# Altium PCB PCB2.PcbDoc
Units mm, origin at the board's own origin, x right, y up, seen from the top; angles counter-clockwise.
Board outline 71.63 x 26.92 mm, 2 copper layers (Top Layer, Bottom Layer); 9 components, 8 nets, 27 pads, 0 vias.
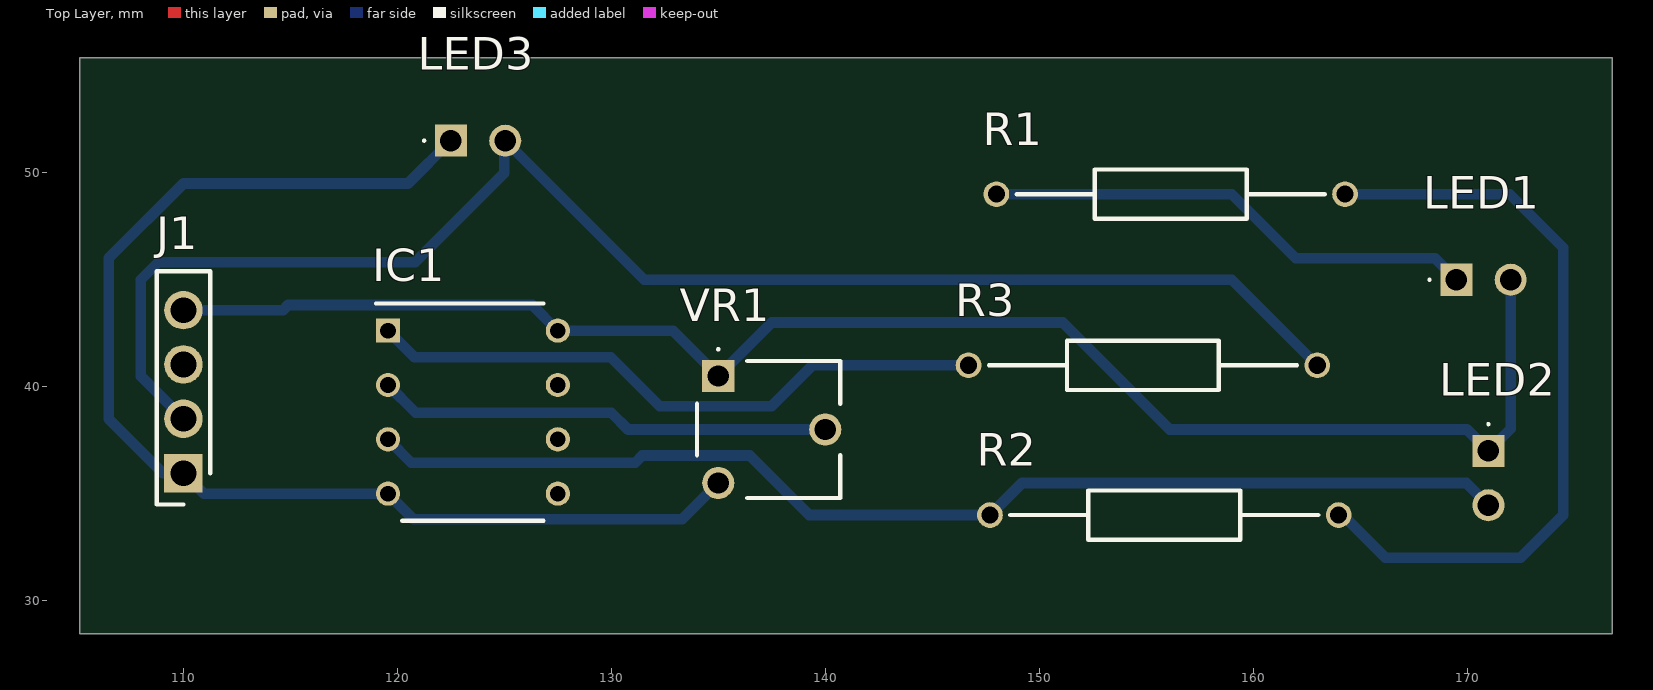
[diagram p0: Top Layer view]
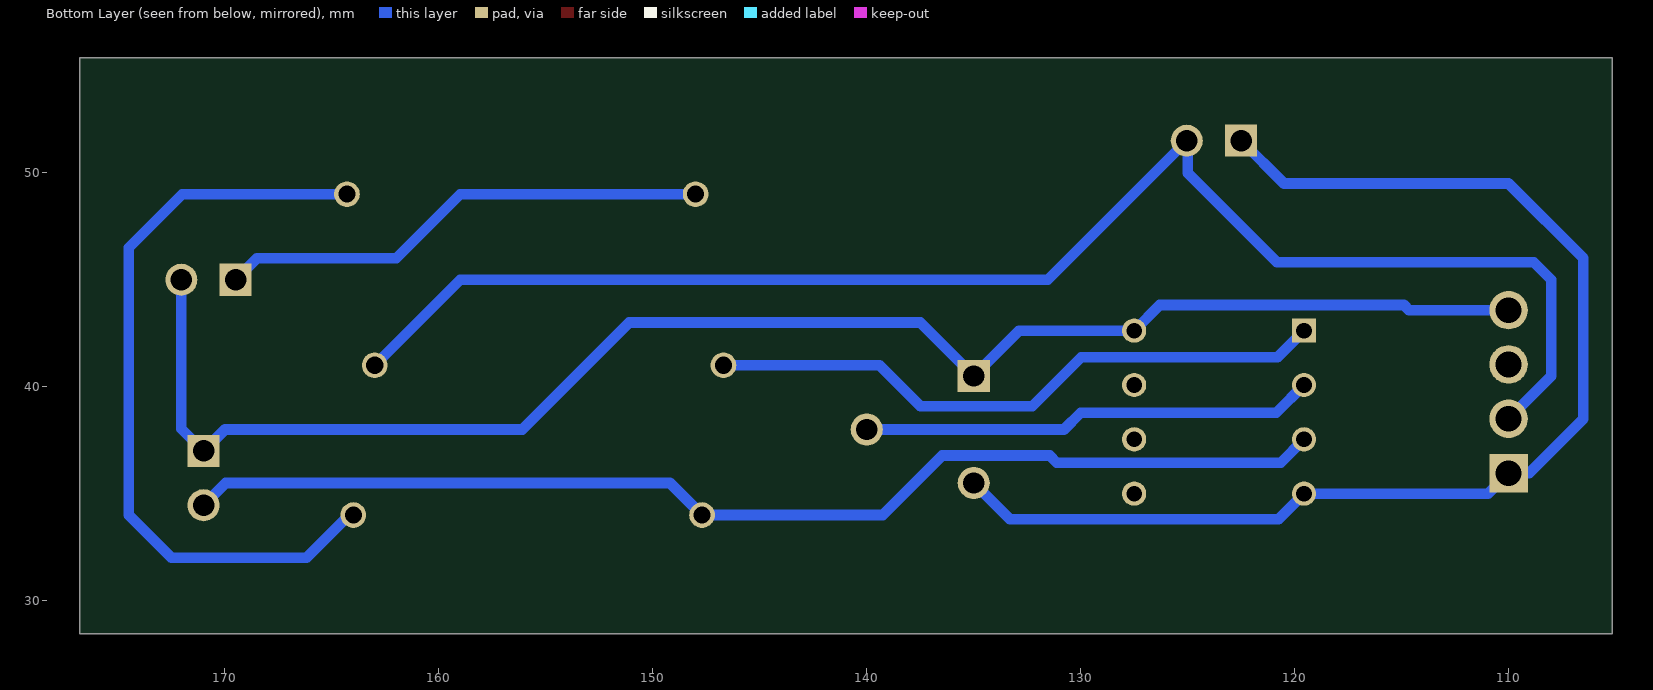
[diagram p1: Bottom Layer view, seen from below]
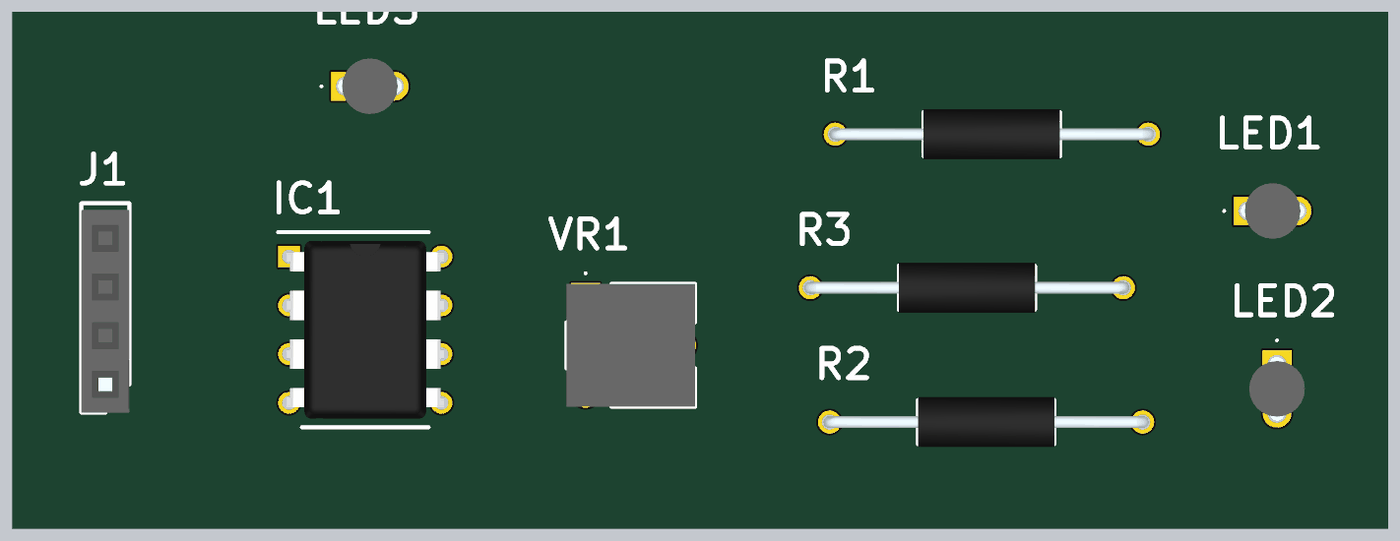
[diagram p2: 3D render of the assembled board from above, using the file's embedded part models]

## Layer stack, top to bottom
Top Solder: solder mask 0.0102, Solder Resist, Dk 3.5
Top Layer: signal copper 0.0356
Dielectric 1: dielectric 0.32, FR-4, Dk 4.8
Bottom Layer: signal copper 0.0356
Bottom Solder: solder mask 0.0102, Solder Resist, Dk 3.5

## Board outline
105.156,28.448 176.784,28.448 176.784,55.372 105.156,55.372

## Design rules (kind name [scope] priority, off if disabled: settings)
Clearance [All] p1: gap=0.254 ignorepadtopadclearanceinfootprint=FALSE
PolygonConnect [All] p1: connectstyle=Relief reliefconductorwidth=0.254 reliefentries=4 polygonreliefangle="90 Angle" airgapwidth=0.254
RoutingVias [All] p1: holewidth=0.711 width=1.27 viastyle="Through Hole" minholewidth=0.711 minwidth=1.27 maxholewidth=0.711 maxwidth=1.27
SilkToSolderMaskClearance [IsPad] p1: minsilkscreentomaskgap=0.1 clearancetoexposedcopper=TRUE
SolderMaskExpansion [All] p1: expansion=0.102 istentingtop=FALSE
SupplyNets "Schematic Supply Nets_1" [InNet('GND')] p1: voltage=0.000
SupplyNets "Schematic Supply Nets" [InNet('+5')] p2: voltage=0.000
Width [All] p1: maxlimit=1 minlimit=0.254 preferedwidth=0.5 minimp=50.000000 maximp=50.000000 favimp=50.000000
29 further rules are at their usual default settings.

## Components (designator, comment, footprint, x,y, rotation, side; value= is the part's Value field where it differs from the comment)
IC1 "LM358APE4" DIP794W53P254L959H508Q8N 123.53,38.81 r0 top
J1 "M20-7820446" RHDR4W70P0X254_1X4_1056X250X865P 110,35.96 r90 top
LED1 "15400385A3590" 15400385A3590 169.5,45 r0 top
LED2 "15400385A3590" 15400385A3590 171,37 r270 top
LED3 "15400385A3590" 15400385A3590 122.5,51.5 r0 top
R1 "100" RESAD1630W60L710D230 164.3,49 r180 top
R2 "10k" RESAD1630W60L710D230 164,34 r180 top
R3 "330" RESAD1630W60L710D230 146.7,41 r0 top
VR1 "EVN-D8AA03B14" EVND8AA03B14 135,40.5 r270 top

## Footprints (in the part's own frame and the unit in brackets; to place one, negate y for a bottom-side part, rotate by r counter-clockwise, add the part's x,y. Pads: shape width x height; smd on the part's side, far side on the other; paste and mask are expansions set on the pad)
15400385A3590 [mm]
  rect 1.5x1.5 hole 1: 1(0,0)
  round 1.5 hole 1: 2(2.54,0)
  silkscreen extent -1.3,-0.05 -1.2,0.05, body extent -0.4,-1.44 2.94,1.44, height 11
DIP794W53P254L959H508Q8N [mm]
  rect 1.13x1.13 hole 0.73: 1(-3.97,3.81)
  round 1.13 hole 0.73: 2(-3.97,1.27) 3(-3.97,-1.27) 4(-3.97,-3.81) 5(3.97,-3.81) 6(3.97,-1.27) 7(3.97,1.27) 8(3.97,3.81)
  silkscreen extent -4.54,-5.08 3.3,5.08, body extent -4.1,-4.64 4.1,4.64, height 4.21
EVND8AA03B14 [mm]
  rect 1.5x1.5 hole 1: 1(0,0)
  round 1.5 hole 1: 2(2.5,5) 3(5,0)
  silkscreen extent -1.3,-1 5.7,5.7, body extent -0.7,-1 5.7,5.7, height 6.55
RESAD1630W60L710D230 [mm]
  round 1.2 hole 0.8: 1(0,0) 2(16.3,0)
  silkscreen extent 0.95,-1.15 15.35,1.15, body extent -0.3,-1.29 16.6,1.29, height 2.6
RHDR4W70P0X254_1X4_1056X250X865P [mm]
  rect 1.8x1.8 hole 1.2: 1(0,0)
  round 1.8 hole 1.2: 2(2.54,0) 3(5.08,0) 4(7.62,0)
  silkscreen extent -1.47,-1.25 9.44,1.25, body extent -1.47,-1.25 9.09,1.25, height 8.65

## Part data
IC1: "Integrated Circuit", Manufacturer_Name="Texas Instruments", Mouser Part Number=595-LM358APE4, Arrow Part Number=LM358APE4, Arrow Price/Stock=https://www.arrow.com/en/products/lm358ape4/texas-instruments?region=nac, Datasheet Link=http://www.ti.com/lit/ds/symlink/lm358a.pdf, Height=5.08mm, Manufacturer_Part_Number=LM358APE4, Mouser Price/Stock=https://www.mouser.co.uk/ProductDetail/Texas-Instruments/LM358APE4?qs=VBduBm9rCJTOdx3RyeRhNA%3D%3D
J1: "Connector", Manufacturer_Name=Harwin, Mouser Part Number=855-M20-7820446, Datasheet Link=https://cdn.harwin.com/pdfs/M20-782.pdf, Height=8.65mm, Manufacturer_Part_Number=M20-7820446, Mouser Price/Stock=https://www.mouser.co.uk/ProductDetail/Harwin/M20-7820446?qs=vF78I%252BjhbY8%252Bno0H8mp9XA%3D%3D
LED1 LED2 LED3: "LED", Manufacturer_Name="Wurth Elektronik", Mouser Part Number=710-15400385A3590, Datasheet Link=https://www.we-online.com/katalog/datasheet/15400385A3590.pdf, Height=10.9mm, Manufacturer_Part_Number=15400385A3590, Mouser Price/Stock=https://www.mouser.co.uk/ProductDetail/Wurth-Elektronik/15400385A3590?qs=5aG0NVq1C4yszs1ddn0oOg%3D%3D
R1 R2 R3: library part MF1_4DCT26A1001F, "Resistor", Manufacturer_Name="KOA Speer", Manufacturer_Part_Number=MF1/4DCT26A1001F, Mouser Part Number=660-MF1/4DCT26A1001F, Datasheet Link=https://componentsearchengine.com/Datasheets/1/MF1_4DCT26A1001F.pdf, Mouser Price/Stock=https://www.mouser.co.uk/ProductDetail/KOA-Speer/MF1-4DCT26A1001F?qs=wVGympPcmnD9Oav1Pii0SQ%3D%3D
VR1: "Variable Resistor", Manufacturer_Name=Panasonic, Mouser Part Number=667-EVN-D8AA03B14, Datasheet Link=https://componentsearchengine.com/Datasheets/1/EVN-D8AA03B14.pdf, Height=6.45mm, Manufacturer_Part_Number=EVN-D8AA03B14, Mouser Price/Stock=https://www.mouser.co.uk/ProductDetail/Panasonic/EVN-D8AA03B14?qs=WwqriLBepZsROPwYCdkbeA%3D%3D

## Nets (pads, with @x,y where several pads share a name; then routed paths per layer and width w, separated by ;. In a path a pad name is that pad's centre, name@x,y a point inside that pad or via, vN(x,y) a via of type N, cw(c..) or ccw(c..) an arc to the next point about the centre after c; other vN are vias at no path point)
+5: IC1.8 J1.4 LED1.2 LED2.1 VR1.1 | length 74.4
  Bottom Layer w0.5: J1.4 114.649,43.58 114.884,43.815 126.305,43.815 IC1.8 132.88,42.62 VR1.1 137.5,43 151.107,43 156.107,38 170,38 LED2.1 172.04,38.04 LED1.2
GND: IC1.4 J1.1 LED3.1 VR1.3 | length 56.9
  Bottom Layer w0.5: LED3.1 120.5,49.5 110,49.5 106.5,46 106.5,38.5 109.04,35.96 J1.1 110.96,35 IC1.4 120.753,33.807 133.307,33.807 VR1.3
NetIC1_1: IC1.1 R3.1 | length 29.4
  Bottom Layer w0.5: IC1.1 120.803,41.377 129.972,41.377 132.258,39.091 137.49,39.091 139.4,41 R3.1
NetIC1_2: IC1.2 VR1.2 | length 21.3
  Bottom Layer w0.5: IC1.2 120.854,38.786 129.997,38.786 130.783,38 VR1.2
NetIC1_3: IC1.3 LED2.2 R2.2 | length 54.2
  Bottom Layer w0.5: IC1.3 120.651,36.449 131.115,36.449 131.445,36.779 136.474,36.779 139.253,34 R2.2 149.2,35.5 169.96,35.5 LED2.2
NetJ1_2: J1.2 LED3.2 R3.2 | length 70.2
  Bottom Layer w0.5: J1.2 108,40.5 108,45 108.822,45.822 120.822,45.822 124.993,49.993 124.993,51.453 LED3.2 131.54,45 159,45 R3.2
NetLED1_1: LED1.1 R1.2 | length 23.2
  Bottom Layer w0.5: R1.2 159,49 162,46 168.5,46 LED1.1
NetR1_1: R1.1 R2.1 | length 35.9
  Bottom Layer w0.5: R2.1 164.189,34 166.189,32 172.5,32 174.5,34 174.5,46.5 172,49 R1.1
pads on no net: IC1.5 IC1.6 IC1.7 J1.3